# Altium PCB PCB_SAE_4_3.pcbdoc
Units mil, origin at the board's own origin, x right, y up, seen from the top; angles counter-clockwise.
Board outline 4438.89 x 3431.53 mil, 2 copper layers (Top Layer, Bottom Layer); 15 components, 43 nets, 94 pads, 0 vias.
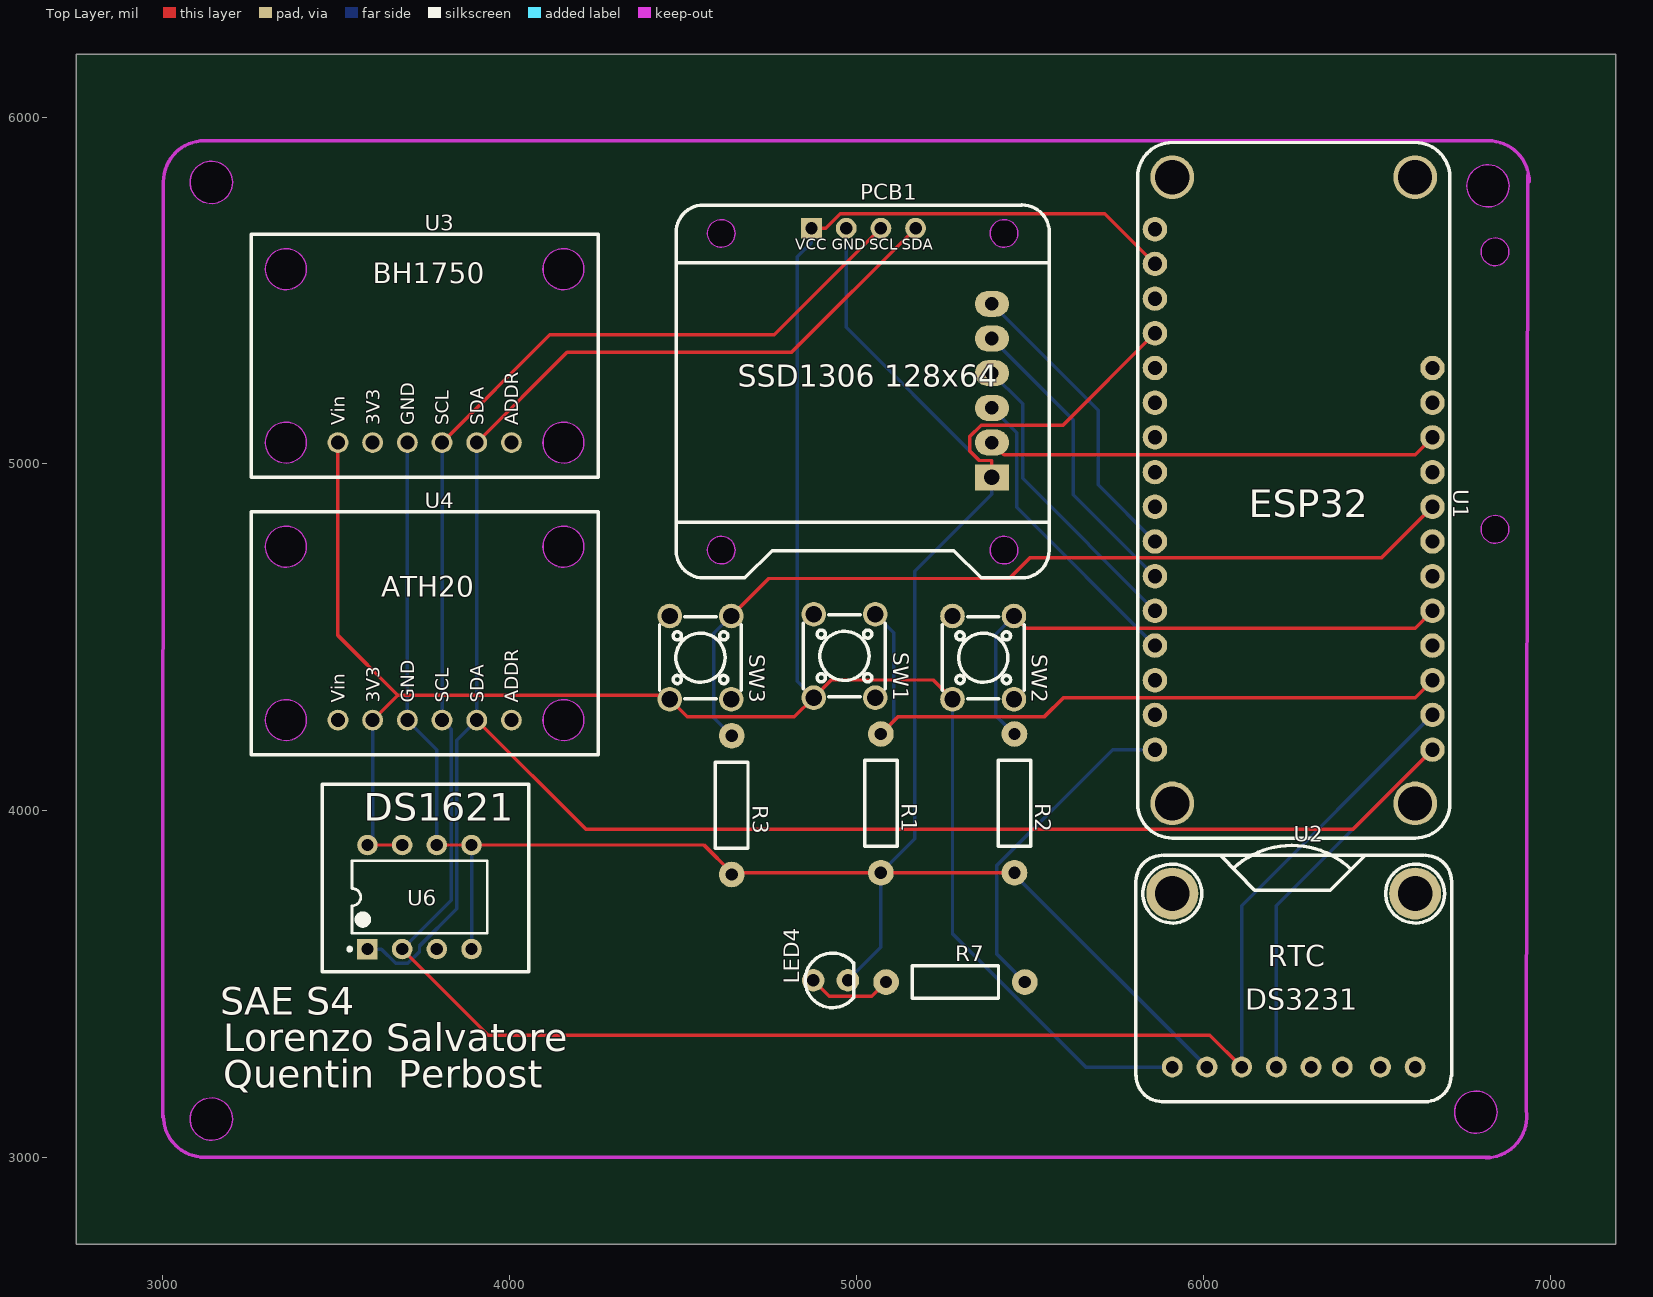
[diagram p0: Top Layer view]
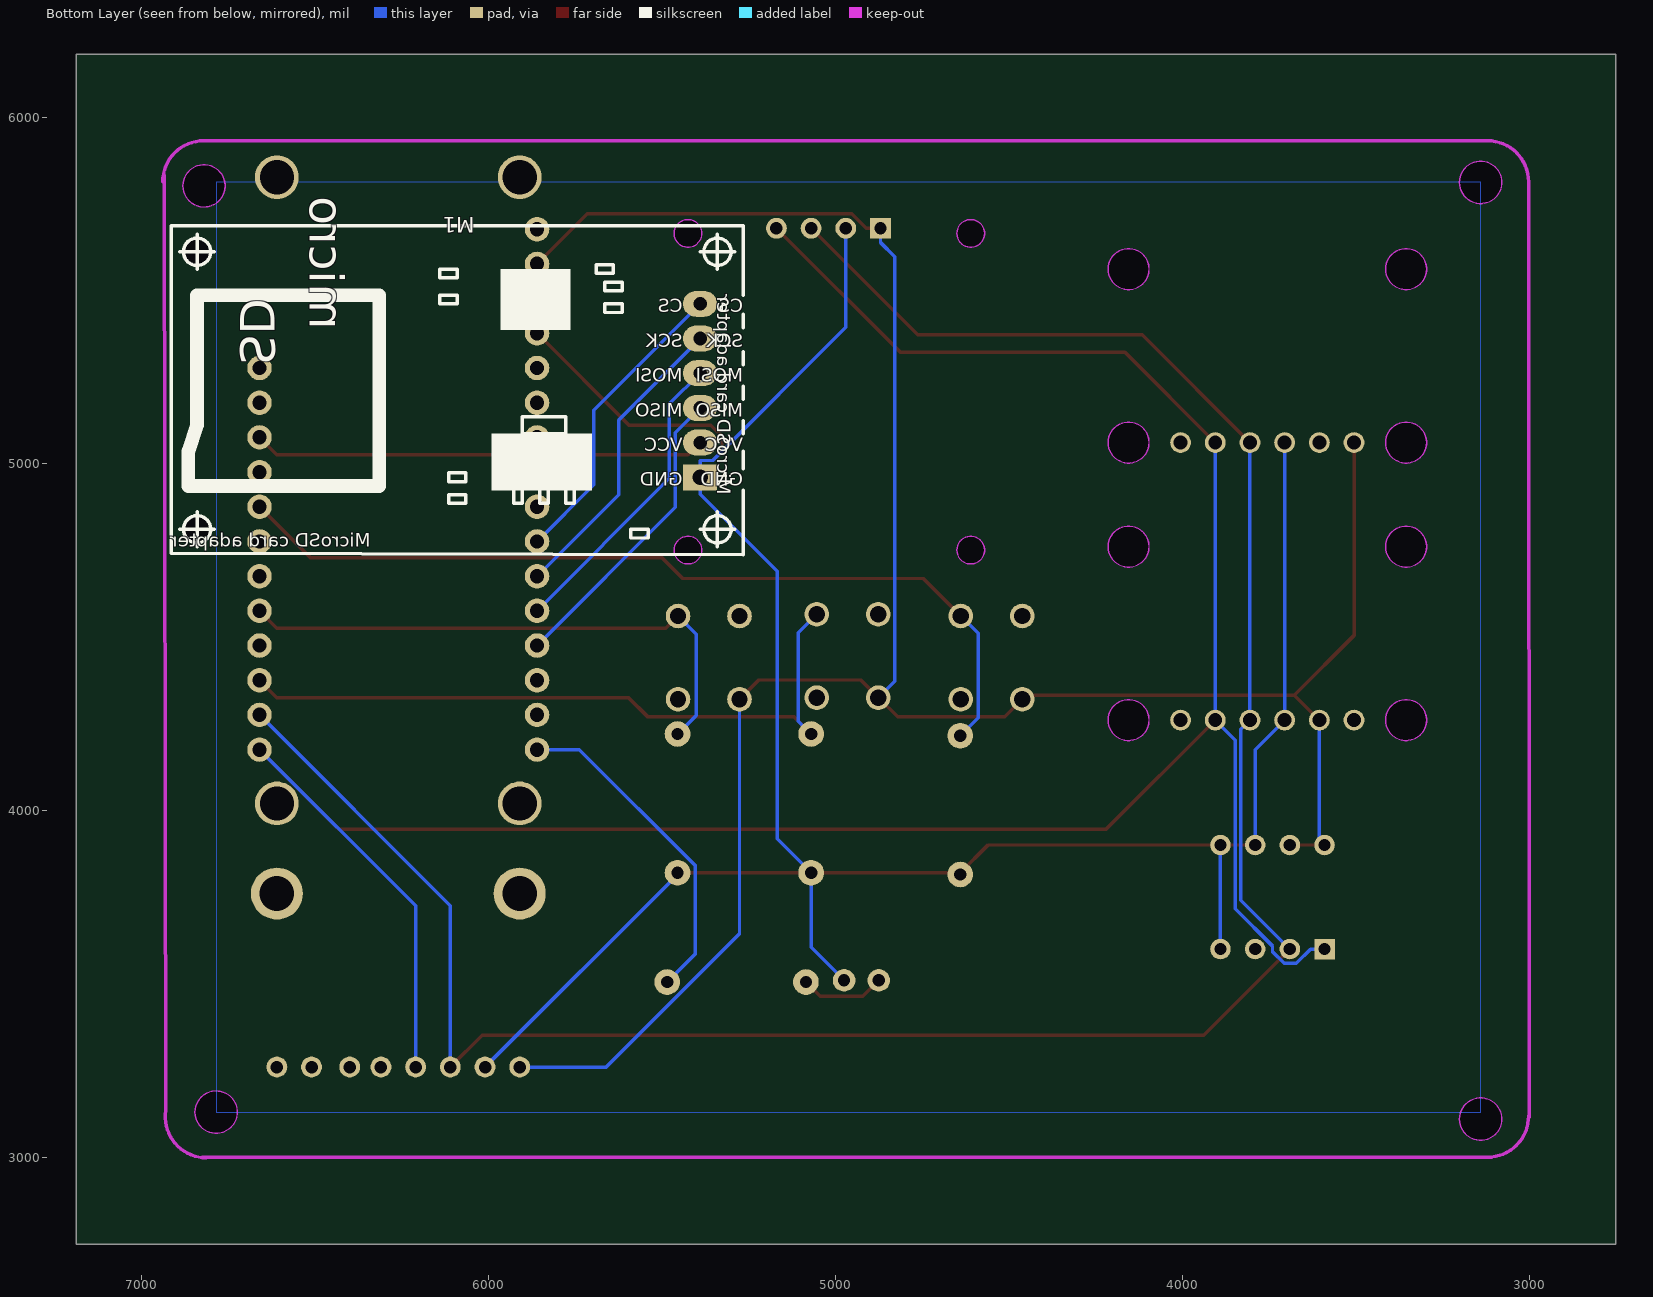
[diagram p1: Bottom Layer view, seen from below]

## Layer stack, top to bottom
Top Layer: signal copper (thickness not stored)
Dielectric: dielectric 12.6, FR-4, Dk 4.8
Bottom Layer: signal copper (thickness not stored)

## Board outline
7188.89,2750 2750,2750 2750,6181.53 7188.89,6181.53
cut-out: 3201.02,5811.53 cw(c3140,5811.53) 3078.98,5811.53 cw(c3140,5811.53)
cut-out: 3201.02,3111.53 cw(c3140,3111.53) 3078.98,3111.53 cw(c3140,3111.53)
cut-out: 6846.02,3131.53 cw(c6785,3131.53) 6723.98,3131.53 cw(c6785,3131.53)
cut-out: 6881.02,5801.53 cw(c6820,5801.53) 6758.98,5801.53 cw(c6820,5801.53)
cut-out: 6880,5611.53 cw(c6840,5611.53) 6800,5611.53 cw(c6840,5611.53)
cut-out: 6880,4811.53 cw(c6840,4811.53) 6800,4811.53 cw(c6840,4811.53)

## Design rules (kind name [scope] priority, off if disabled: settings)
BoardOutlineClearance Default [All] p0: genericclearance=10 ignorepadtopadclearanceinfootprint=FALSE except(0: Region-CutoutEdge Arc-SplitContinuation Track-SplitContinuation SMDPad-SplitContinuation THPad-SplitContinuation Via-SplitContinuation Fill-SplitContinuation Poly-SplitContinuation Region-SplitContinuation Text-SplitContinuation; 6: Track-OutlineEdge SMDPad-OutlineEdge THPad-OutlineEdge Via-OutlineEdge Fill-OutlineEdge Region-OutlineEdge Poly-OutlineEdge Text-OutlineEdge Track-CutoutEdge SMDPad-CutoutEdge THPad-CutoutEdge Via-CutoutEdge Fill-CutoutEdge)
Clearance Default [(InNet('LED4_1') OR InNet('+5V') OR InNet('U1_17') OR InNet('VCC') OR InNet('DATA_3') OR InNet('DATA_2') OR InNet('DATA_1') OR InNet('3V3') OR InNet('U1_18') OR InNet('U1_10') OR InNet('U1_11') OR InNet('U1_12') OR InNet('U1_13') OR InNet('DATA_6') OR InNet('SW1_2') OR InNet('SW1_3') OR InNet('SW2_2') OR InNet('SW2_3') OR InNet('SW3_2') OR InNet('SW3_3') OR InNet('U1_9') OR InNet('U1_1') OR InNet('U1_3') OR InNet('U1_15') OR InNet('U1_14') OR InNet('U1_8') OR InNet('U1_7') OR InNet('U1_6') OR InNet('U1_5') OR InNet('U1_20') OR InNet('U1_22') OR InNet('U1_23') OR InNet('U1_25') OR InNet('U1_27') OR InNet('U1_28') OR InNet('U2_5') OR InNet('U2_6') OR InNet('U2_7') OR InNet('U2_8') OR InNet('U3_2') OR InNet('U3_6') OR InNet('ADDR') OR InNet('U6_3'))] p1: gap=7 ignorepadtopadclearanceinfootprint=FALSE except(0: Region-Region; 6: Track-Track Track-SMDPad SMDPad-SMDPad Track-THPad SMDPad-THPad THPad-THPad Track-Via SMDPad-Via THPad-Via Via-Via Track-Fill SMDPad-Fill THPad-Fill Via-Fill Fill-Fill Track-Region SMDPad-Region THPad-Region Via-Region Fill-Region Track-Poly SMDPad-Poly THPad-Poly Via-Poly Fill-Poly Region-Poly Poly-Poly Track-Text SMDPad-Text THPad-Text Via-Text Fill-Text Region-Text Poly-Text Text-Text Track-Sheet SMDPad-Sheet THPad-Sheet Via-Sheet Fill-Sheet Region-Sheet Poly-Sheet Text-Sheet Track-Hole SMDPad-Hole THPad-Hole Via-Hole Fill-Hole Region-Hole Poly-Hole Text-Hole Sheet-Hole)
DiffPairsRouting differentialPair [All] p1: maxuncoupledlength=10 minlimit=6 maxlimit=6 mostfreqgap=6 toplayer_minwidth=5 toplayer_prefwidth=10 toplayer_maxwidth=100 bottomlayer_minwidth=5 bottomlayer_prefwidth=10 bottomlayer_maxwidth=100
PasteMaskExpansion Common [All] p1: expansion=0
PlaneConnect Default [All] p1: planeconnectstyle=Relief reliefexpansion=20 reliefentries=4 reliefconductorwidth=0 reliefairgap=10
PolygonConnect Default [All] p1: connectstyle=Relief reliefentries=4 reliefconductorwidth=0 polygonreliefangle="90 Angle" airgapwidth=10
RoutingVias Default [All] p1: viastyle="Through Hole" holewidth=12.008 minholewidth=12.008 maxholewidth=2362 width=24.016 minwidth=24.016 maxwidth=3938
SolderMaskExpansion Common [All] p1: useseparateexpansions=TRUE expansion=2 expansionbottom=2
Width Default [All] p1: maxlimit=1000 minlimit=10 preferedwidth=10

## Components (designator, comment, footprint, x,y, rotation, side; value= is the part's Value field where it differs from the comment)
LED4 "LED-TH-3mm_B" LED-TH_BD3.0_BLUE 4925,3511.53 r90 top
M1 "Adaptateur micro SD" MICROSD_ADAPTER_BOARD 5390,4961.53 r180 bottom locked
PCB1 "SSD1306-128X64-OLED-SPI COPY" SSD1306 4480,4671.53 r0 top
R1 "1k" R_AXIAL-0.4 5070,4021.53 r270 top
R2 "1k" R_AXIAL-0.4 5455,4021.53 r270 top
R3 "1k" R_AXIAL-0.4 4640,4016.53 r270 top
R7 "1k" R_AXIAL-0.4 5285,3506.53 r0 top
SW1 "Button-6x6x6mm" SW-TH_4P-L6.0-W6.0-P4.50-LS6.1 4965,4446.53 r270 top
SW2 "Button-6x6x6mm" SW-TH_4P-L6.0-W6.0-P4.50-LS6.1 5365,4441.53 r270 top
SW3 "Button-6x6x6mm" SW-TH_4P-L6.0-W6.0-P4.50-LS6.1 4550,4441.53 r270 top
U1 "Feather ESP32" "ADAFRUIT FEATHER ESP32" 5810,5926.53 r270 top locked
U2 "RTC-DS3231-ADAFRUIT" RTC-DS3231-ADAFRUIT 6260,3511.53 r0 top
U3 "BH1750 - Adafruit" "BH1750 - ADAFRUIT" 3255,4961.53 r0 top
U4 "ATH20- Adafruit" "BH1750 - ADAFRUIT" 3255,4161.53 r0 top
U6 "DS1621+" DIP-8_L9.8-W6.6-P2.54-LS7.6-BL 3740,3751.53 r0 top

## Footprints (in the part's own frame and the unit in brackets; to place one, negate y for a bottom-side part, rotate by r counter-clockwise, add the part's x,y. Pads: shape width x height; smd on the part's side, far side on the other; paste and mask are expansions set on the pad)
"ADAFRUIT FEATHER ESP32" [mil]
  round 70.5 hole 41.4: 1(250,50) 2(350,50) 3(450,50) 4(550,50) 5(650,50) 6(750,50) 7(850,50) 8(950,50) 9(1050,50) 10(1150,50) 11(1250,50) 12(1350,50) 13(1450,50) 14(1550,50) 15(1650,50) 16(1750,50) 17(1750,850) 18(1650,850) 19(1550,850) 20(1450,850) 21(1350,850) 22(1250,850) 23(1150,850) 24(1050,850) 25(950,850) 26(850,850) 27(750,850) 28(650,850)
  round 125.98 hole 98.43: 29(100,800) 29(100,100) 29(1905,800) 29(1905,100)
  silkscreen extent 0,0 2005,900
"BH1750 - ADAFRUIT" [mil]
  round 60 hole 40.16: 1(250,100) 2(350,100) 3(450,100) 4(550,100) 5(650,100) 6(750,100)
  Board Outline Layer circle w0.2: c100,600 r59.05
  Board Outline Layer circle w0.2: c900,600 r59.05
  Board Outline Layer circle w0.2: c900,100 r59.05
  Board Outline Layer circle w0.2: c100,100 r59.05
  Board Outline Layer region: 159.05,600 153.21,574.38 136.82,553.83 113.14,542.43 86.86,542.43 63.18,553.83 46.79,574.38 40.95,600 40.95,600 46.79,625.62 63.18,646.17 86.86,657.57 113.14,657.57 136.82,646.17 153.21,625.62 159.05,600
  Board Outline Layer region: 959.06,600 953.21,574.38 936.82,553.83 913.14,542.43 886.86,542.43 863.18,553.83 846.79,574.38 840.95,600 840.95,600 846.79,625.62 863.18,646.17 886.86,657.57 913.14,657.57 936.82,646.17 953.21,625.62 959.06,600
  Board Outline Layer region: 959.06,100 953.21,74.38 936.82,53.83 913.14,42.43 886.86,42.43 863.18,53.83 846.79,74.38 840.95,100 840.95,100 846.79,125.62 863.18,146.17 886.86,157.57 913.14,157.57 936.82,146.17 953.21,125.62 959.06,100
  Board Outline Layer region: 159.05,100 153.21,74.38 136.82,53.83 113.14,42.43 86.86,42.43 63.18,53.83 46.79,74.38 40.95,100 40.95,100 46.79,125.62 63.18,146.17 86.86,157.57 113.14,157.57 136.82,146.17 153.21,125.62 159.05,100
  Multi-Layer board cut-out: 159.05,600 153.21,574.38 136.82,553.83 113.14,542.43 86.86,542.43 63.18,553.83 46.79,574.38 40.95,600 40.95,600 46.79,625.62 63.18,646.17 86.86,657.57 113.14,657.57 136.82,646.17 153.21,625.62 159.05,600
  Multi-Layer board cut-out: 959.06,600 953.21,574.38 936.82,553.83 913.14,542.43 886.86,542.43 863.18,553.83 846.79,574.38 840.95,600 840.95,600 846.79,625.62 863.18,646.17 886.86,657.57 913.14,657.57 936.82,646.17 953.21,625.62 959.06,600
  Multi-Layer board cut-out: 959.06,100 953.21,74.38 936.82,53.83 913.14,42.43 886.86,42.43 863.18,53.83 846.79,74.38 840.95,100 840.95,100 846.79,125.62 863.18,146.17 886.86,157.57 913.14,157.57 936.82,146.17 953.21,125.62 959.06,100
  Multi-Layer board cut-out: 159.05,100 153.21,74.38 136.82,53.83 113.14,42.43 86.86,42.43 63.18,53.83 46.79,74.38 40.95,100 40.95,100 46.79,125.62 63.18,146.17 86.86,157.57 113.14,157.57 136.82,146.17 153.21,125.62 159.05,100
  silkscreen extent 0,0 1000,700
DIP-8_L9.8-W6.6-P2.54-LS7.6-BL [mm]
  rect 1.5x1.5 hole 0.9: 1(-3.81,-3.81)
  round 1.5 hole 0.9: 2(-1.27,-3.81) 3(1.27,-3.81) 4(3.81,-3.81) 5(3.81,3.81) 6(1.27,3.81) 7(-1.27,3.81) 8(-3.81,3.81)
  silkscreen extent -5.23,-3.93 4.96,2.65
LED-TH_BD3.0_BLUE [mil]
  round 65 hole 35.43: 1(0,50) 2(0,-50)
  silkscreen extent -79,-66 79,73
MICROSD_ADAPTER_BOARD [mm]
  rect 2.5x1.9 hole 1.138: 1(0,0)
  oval 2.5x1.9 hole 1: 2(0,2.54) 3(0,12.7) 4(0,5.08) 5(0,7.62) 6(0,10.16)
  silkscreen extent -38.73,-5.67 3.18,18.42
R_AXIAL-0.4 [mil]
  round 74 hole 35.4: 1(-200,0) 2(200,0)
  silkscreen extent -124,-47 124,47
RTC-DS3231-ADAFRUIT [mil]
  round 60 hole 36: 1(-350,-250) 2(-250,-250) 3(-150,-250) 4(-50,-250) 5(50,-250) 6(140,-250) 7(250,-250) 8(350,-250)
  round 150 hole 100: 9(-350,250) 9(350,250)
  silkscreen extent -455,-350 455,389
SSD1306 [mil]
  rect 60x60 hole 36: 1(390,1007.87)
  round 60 hole 36: 2(490,1007.9) 3(590,1007.9) 4(690,1007.9)
  Board Outline Layer circle w0.2: c130,80 r40
  Board Outline Layer circle w0.2: c945,80 r40
  Board Outline Layer circle w0.2: c130,993 r40
  Board Outline Layer circle w0.2: c945,993 r40
  Board Outline Layer region: 170,80 166.04,62.64 154.94,48.73 138.9,41 121.1,41 105.06,48.73 93.96,62.64 90,80 90,80 93.96,97.36 105.06,111.27 121.1,119 138.9,119 154.94,111.27 166.04,97.36 170,80
  Board Outline Layer region: 985,80 981.04,62.64 969.94,48.73 953.9,41 936.1,41 920.06,48.73 908.96,62.64 905,80 905,80 908.96,97.36 920.06,111.27 936.1,119 953.9,119 969.94,111.27 981.04,97.36 985,80
  Board Outline Layer region: 170,993 166.04,975.64 154.94,961.73 138.9,954 121.1,954 105.06,961.73 93.96,975.64 90,993 90,993 93.96,1010.36 105.06,1024.27 121.1,1032 138.9,1032 154.94,1024.27 166.04,1010.36 170,993
  Board Outline Layer region: 985,993 981.04,975.64 969.94,961.73 953.9,954 936.1,954 920.06,961.73 908.96,975.64 905,993 905,993 908.96,1010.36 920.06,1024.27 936.1,1032 953.9,1032 969.94,1024.27 981.04,1010.36 985,993
  Multi-Layer board cut-out: 170,80 166.04,62.64 154.94,48.73 138.9,41 121.1,41 105.06,48.73 93.96,62.64 90,80 90,80 93.96,97.36 105.06,111.27 121.1,119 138.9,119 154.94,111.27 166.04,97.36 170,80
  Multi-Layer board cut-out: 985,80 981.04,62.64 969.94,48.73 953.9,41 936.1,41 920.06,48.73 908.96,62.64 905,80 905,80 908.96,97.36 920.06,111.27 936.1,119 953.9,119 969.94,111.27 981.04,97.36 985,80
  Multi-Layer board cut-out: 170,993 166.04,975.64 154.94,961.73 138.9,954 121.1,954 105.06,961.73 93.96,975.64 90,993 90,993 93.96,1010.36 105.06,1024.27 121.1,1032 138.9,1032 154.94,1024.27 166.04,1010.36 170,993
  Multi-Layer board cut-out: 985,993 981.04,975.64 969.94,961.73 953.9,954 936.1,954 920.06,961.73 908.96,975.64 905,993 905,993 908.96,1010.36 920.06,1024.27 936.1,1032 953.9,1032 969.94,1024.27 981.04,1010.36 985,993
  silkscreen extent 0,0 1075,1075
SW-TH_4P-L6.0-W6.0-P4.50-LS6.1 [mm]
  round 1.8 hole 1.2: 1(-3.05,2.25) 2(3.05,2.25) 3(-3.05,-2.25) 4(3.05,-2.25)
  silkscreen extent -3,-3 3,3

## Nets (pads, with @x,y where several pads share a name; then routed paths per layer and width w, separated by ;. In a path a pad name is that pad's centre, name@x,y a point inside that pad or via, vN(x,y) a via of type N, cw(c..) or ccw(c..) an arc to the next point about the centre after c; other vN are vias at no path point)
3V3: LED4.2 M1.1 PCB1.2 R1.2 R2.2 R3.2 U1.4 U2.2 U3.3 U4.3 U6.4 U6.5 U6.6 | length 7345.8
  Top Layer w10: U6.6 U6.5 4560,3901.53 R3.2@4640,3821.53 ; R3.2 R3.2@4640,3821.53 ; M1.1 5390,5009.92 5353.71,5009.92 5325.5,5038.13 5325.5,5077.9 5359.13,5111.53 5595,5111.53 U1.4 ; R2.2 R1.2 R3.2@4640,3821.53
  Bottom Layer w10: U3.3 U4.3 3790,4176.53 U6.6 ; U6.4 U6.5 ; PCB1.2 4970,5393.63 5353.71,5009.92 5390,5009.92 M1.1 5390,4913.14 5167.51,4690.65 5167.51,3919.04 R1.2 5070,3606.53 LED4.2 ; R2.2 5455,3816.53 U2.2
+5V: M1.2 U1.26 | length 1305.2
  Top Layer w10: M1.2 5425,5026.53 6610,5026.53 U1.26
ADDR: U4.6
DATA_1: R1.1 SW1.1 U1.19 | length 2036.3
  Top Layer w10: R1.1 5120.36,4271.89 5541.69,4271.89 5596.33,4326.53 6610,4326.53 U1.19
  Bottom Layer w10: SW1.1 5106.52,4513.67 5106.52,4258.05 R1.1
DATA_2: R2.1 SW2.1 U1.21 | length 1625.4
  Top Layer w10: SW2.1 5488.66,4526.53 6610,4526.53 U1.21
  Bottom Layer w10: SW2.1 5401.57,4509.6 5401.57,4274.96 R2.1
DATA_3: R3.1 SW3.1 U1.24 | length 2538.9
  Top Layer w10: SW3.1 4746.74,4669.77 5440.3,4669.77 5500.75,4730.22 6513.69,4730.22 U1.24
  Bottom Layer w10: SW3.1 4588.7,4511.73 4588.7,4267.83 R3.1
DATA_6: R7.2 U1.16 | length 964.3
  Bottom Layer w10: R7.2 5403.39,3588.14 5403.39,3841.71 5738.21,4176.53 U1.16
LED4_1: LED4.1 R7.1 | length 246.1
  Top Layer w10: LED4.1 4921.12,3465.41 5043.88,3465.41 R7.1
SW1_2: SW1.2
SW1_3: SW1.3
SW2_2: SW2.2
SW2_3: SW2.3
SW3_2: SW3.2
SW3_3: SW3.3
U1_1: U1.1
U1_3: U1.3
U1_5: U1.5
U1_6: U1.6
U1_7: U1.7
U1_8: U1.8
U1_9: U1.9
U1_10: M1.3 U1.10 | length 879.7
  Bottom Layer w10: M1.3 5696.96,5154.57 5696.96,4939.57 U1.10
U1_11: M1.6 U1.11 | length 879.7
  Bottom Layer w10: M1.6 5624.93,5126.6 5624.93,4911.6 U1.11
U1_12: M1.5 U1.12 | length 879.7
  Bottom Layer w10: M1.5 5478.37,5173.16 5478.37,4958.16 U1.12
U1_13: M1.4 U1.13 | length 879.7
  Bottom Layer w10: M1.4 5461.95,5089.58 5461.95,4874.58 U1.13
U1_14: U1.14
U1_15: U1.15
U1_17: PCB1.4 U1.17 U2.4 U3.5 U4.5 U6.1 | length 7320
  Top Layer w10: U4.5 4220.22,3946.31 6429.78,3946.31 U1.17 ; U3.5 4165.35,5321.88 4812.45,5321.88 PCB1.4
  Bottom Layer w10: U6.1 3630.52,3601.53 3671.49,3560.56 3706.55,3560.56 3740,3594.01 3740,3610.43 3847.31,3717.74 3847.31,4203.84 U4.5 U3.5 ; U2.4 6210,3726.53 U1.17
U1_18: PCB1.3 U1.18 U2.3 U3.4 U4.4 U6.2 | length 6854
  Top Layer w10: U6.2 3938.5,3353.03 6018.5,3353.03 U2.3 ; U3.4 4115.64,5372.17 4762.74,5372.17 PCB1.3
  Bottom Layer w10: U6.2 3831.25,3742.78 3831.25,4235.28 U4.4 U3.4 ; U2.3 6110,3726.53 U1.18
U1_20: U1.20
U1_22: U1.22
U1_23: U1.23
U1_25: U1.25
U1_27: U1.27
U1_28: U1.28
U2_5: U2.5
U2_6: U2.6
U2_7: U2.7
U2_8: U2.8
U3_2: U3.2
U3_6: U3.6
U6_3: U6.3
VCC: PCB1.1 SW1.4 SW2.4 SW3.4 U1.2 U2.1 U3.1 U4.2 U6.7 U6.8 | length 6985.1
  Top Layer w10: U3.1 3505,4505.57 3677.02,4333.55 ; U6.8 U6.7 ; U4.2 3677.02,4333.55 ; PCB1.1 4910.99,5679.4 4952.84,5721.25 5715.28,5721.25 U1.2 ; SW2.4@5276.42,4321.45 5220.73,4377.14 4927.11,4377.14 4876.42,4326.45 4820.78,4270.81 4512.06,4270.81 4461.42,4321.45 4449.32,4333.55 3677.02,4333.55
  Bottom Layer w10: U6.8 3605,3916.53 U4.2 ; PCB1.1 4870,5638.41 4829.01,5597.42 4829.01,4373.86 SW1.4@4876.42,4326.45 ; SW2.4@5276.42,4321.45 5276.42,3645.69 5660.58,3261.53 U2.1
pads on no net: U1.29 U2.9 U4.1

## Polygon pours and split planes (outlines as drawn)
3V3 on Bottom Layer (solid, remove dead copper, pour order 0): 3140,5811.53 6785,5811.53 6785,3131.53 3140,3131.53

## Keep-outs
Board Outline Layer:
  circle w1: c3140,5811.53 r61.02
  region: 3201.02,5811.53 cw(c3140,5811.53) 3078.98,5811.53 cw(c3140,5811.53)
  circle w1: c3140,3111.53 r61.02
  region: 3201.02,3111.53 cw(c3140,3111.53) 3078.98,3111.53 cw(c3140,3111.53)
  circle w1: c6785,3131.53 r61.02
  region: 6846.02,3131.53 cw(c6785,3131.53) 6723.98,3131.53 cw(c6785,3131.53)
  circle w1: c6820,5801.53 r61.02
  region: 6881.02,5801.53 cw(c6820,5801.53) 6758.98,5801.53 cw(c6820,5801.53)
  circle w1: c6840,5611.53 r40
  region: 6880,5611.53 cw(c6840,5611.53) 6800,5611.53 cw(c6840,5611.53)
  circle w1: c6840,4811.53 r40
  region: 6880,4811.53 cw(c6840,4811.53) 6800,4811.53 cw(c6840,4811.53)
  lines w10: 3000,3116.53 3001.89,5813.42 cw(c3120,5813.42) 3120,5931.53 6820.78,5931.53 cw(c6820.78,5813.42) 6938.89,5813.42 ; 3001.9,3121.5 ccw(c3120,3119.64) 3120,3001.53 ; 3115,3001.53 6825,3001.53 ; 6813.33,3000 ccw(c6813.34,3118.11) 6930,3136.53 6935,5831.53

## Silkscreen, mask and mechanical layers (free items; w line width, h text height)
Top Silkscreen Layer:
  lines w10: 3500,4076.53 4055,4076.53 4055,3536.53 3460,3536.53 3460,4076.53 3515,4076.53
  text "ESP32" at 6130,4846.53 h80
  text "DS1621" at 3580,3971.53 h80
  text "SAE S4" at 3165,3411.53 h80
  text "Lorenzo Salvatore" at 3175,3306.53 h80
  text "Quentin  Perbost" at 3175,3201.53 h80
Mechanical Layer:
  circle w1: c3140,5811.53 r61.02
  circle w1: c3140,3111.53 r61.02
  circle w1: c6785,3131.53 r61.02
  circle w1: c6820,5801.53 r61.02
  circle w1: c6840,5611.53 r40
  circle w1: c6840,4811.53 r40

## Text inside footprints (layer, text, board x,y; h text height)
M1: Bottom Silkscreen Layer "VCC" at 5265,5036.53 h39.37; Bottom Silkscreen Layer "GND" at 5265,4936.53 h39.37; Bottom Silkscreen Layer "CS" at 5265,5436.53 h39.37; Bottom Silkscreen Layer "SCK" at 5265,5336.53 h39.37; Bottom Silkscreen Layer "MISO" at 5265,5136.53 h39.37; Bottom Silkscreen Layer "MOSI" at 5265,5236.53 h39.37; Bottom Silkscreen Layer "MicroSD card adapter" at 6340,4761.53 h39.37; Bottom Silkscreen Layer "micro" at 6515,5386.53 h98.42 r90; Bottom Silkscreen Layer "SD" at 6715,5286.53 h98.42 r90; Bottom Silkscreen Layer "MicroSD card adapter" at 5340.57,4911.53 h39.37 r90; Bottom Silkscreen Layer "CS" at 5440,5436.53 h39.37; Bottom Silkscreen Layer "SCK" at 5440,5336.53 h39.37; Bottom Silkscreen Layer "MOSI" at 5440,5236.53 h39.37; Bottom Silkscreen Layer "MISO" at 5440,5136.53 h39.37; Bottom Silkscreen Layer "VCC" at 5440,5036.53 h39.37; Bottom Silkscreen Layer "GND" at 5440,4936.53 h39.37
PCB1: Top Silkscreen Layer "VCC" at 4822.7,5616.93 h31.5; Top Silkscreen Layer "GND" at 4928.9,5617.33 h31.5; Top Silkscreen Layer "SCL" at 5037.1,5617.33 h31.5; Top Silkscreen Layer "SDA" at 5129.6,5616.93 h31.5; Top Silkscreen Layer "SSD1306 128x64" at 4657.2,5222.73 h62.99
U2: Mech6 "GND" at 5970,3176.53 h30; Mech6 "Vin" at 5880,3311.53 h30; Mech6 "SDA" at 6180,3176.53 h30; Mech6 "SCL" at 6073.25,3311.61 h30; Mech6 "SQW" at 6470,3311.53 h30; Top Silkscreen Layer "RTC" at 6185,3551.53 h60; Top Silkscreen Layer "DS3231" at 6120,3426.53 h60; Mech6 "BAT" at 6275,3311.53 h30; Mech6 "32K" at 6375,3176.53 h30; Mech6 "RST" at 6575,3176.53 h30
U3: Top Silkscreen Layer "BH1750" at 3605,5521.53 h59.05; Top Silkscreen Layer "3V3" at 3625,5111.53 h39.37 r90; Top Silkscreen Layer "Vin" at 3525,5111.53 h39.37 r90; Top Silkscreen Layer "GND" at 3725,5111.53 h39.37 r90; Top Silkscreen Layer "SCL" at 3825,5111.53 h39.37 r90; Top Silkscreen Layer "SDA" at 3925,5111.53 h39.37 r90; Top Silkscreen Layer "ADDR" at 4025,5111.53 h39.37 r90
U4: Top Silkscreen Layer "ATH20" at 3630,4616.53 h59.05; Top Silkscreen Layer "3V3" at 3625,4311.53 h39.37 r90; Top Silkscreen Layer "Vin" at 3525,4311.53 h39.37 r90; Top Silkscreen Layer "GND" at 3725,4311.53 h39.37 r90; Top Silkscreen Layer "SCL" at 3825,4311.53 h39.37 r90; Top Silkscreen Layer "SDA" at 3925,4311.53 h39.37 r90; Top Silkscreen Layer "ADDR" at 4025,4311.53 h39.37 r90